# Altium PCB 606-200041.PcbDoc
Units mm, origin at the board's own origin, x right, y up, seen from the top; angles counter-clockwise.
Board outline 38.5 x 27 mm, 4 copper layers (L01 Top Layer, L02 GND, L03 PWR, L04 Bottom Layer), stack 0.86 mm thick; 32 components, 20 nets, 125 pads, 121 vias.
Unrouted connection lines stored in the file: 1.
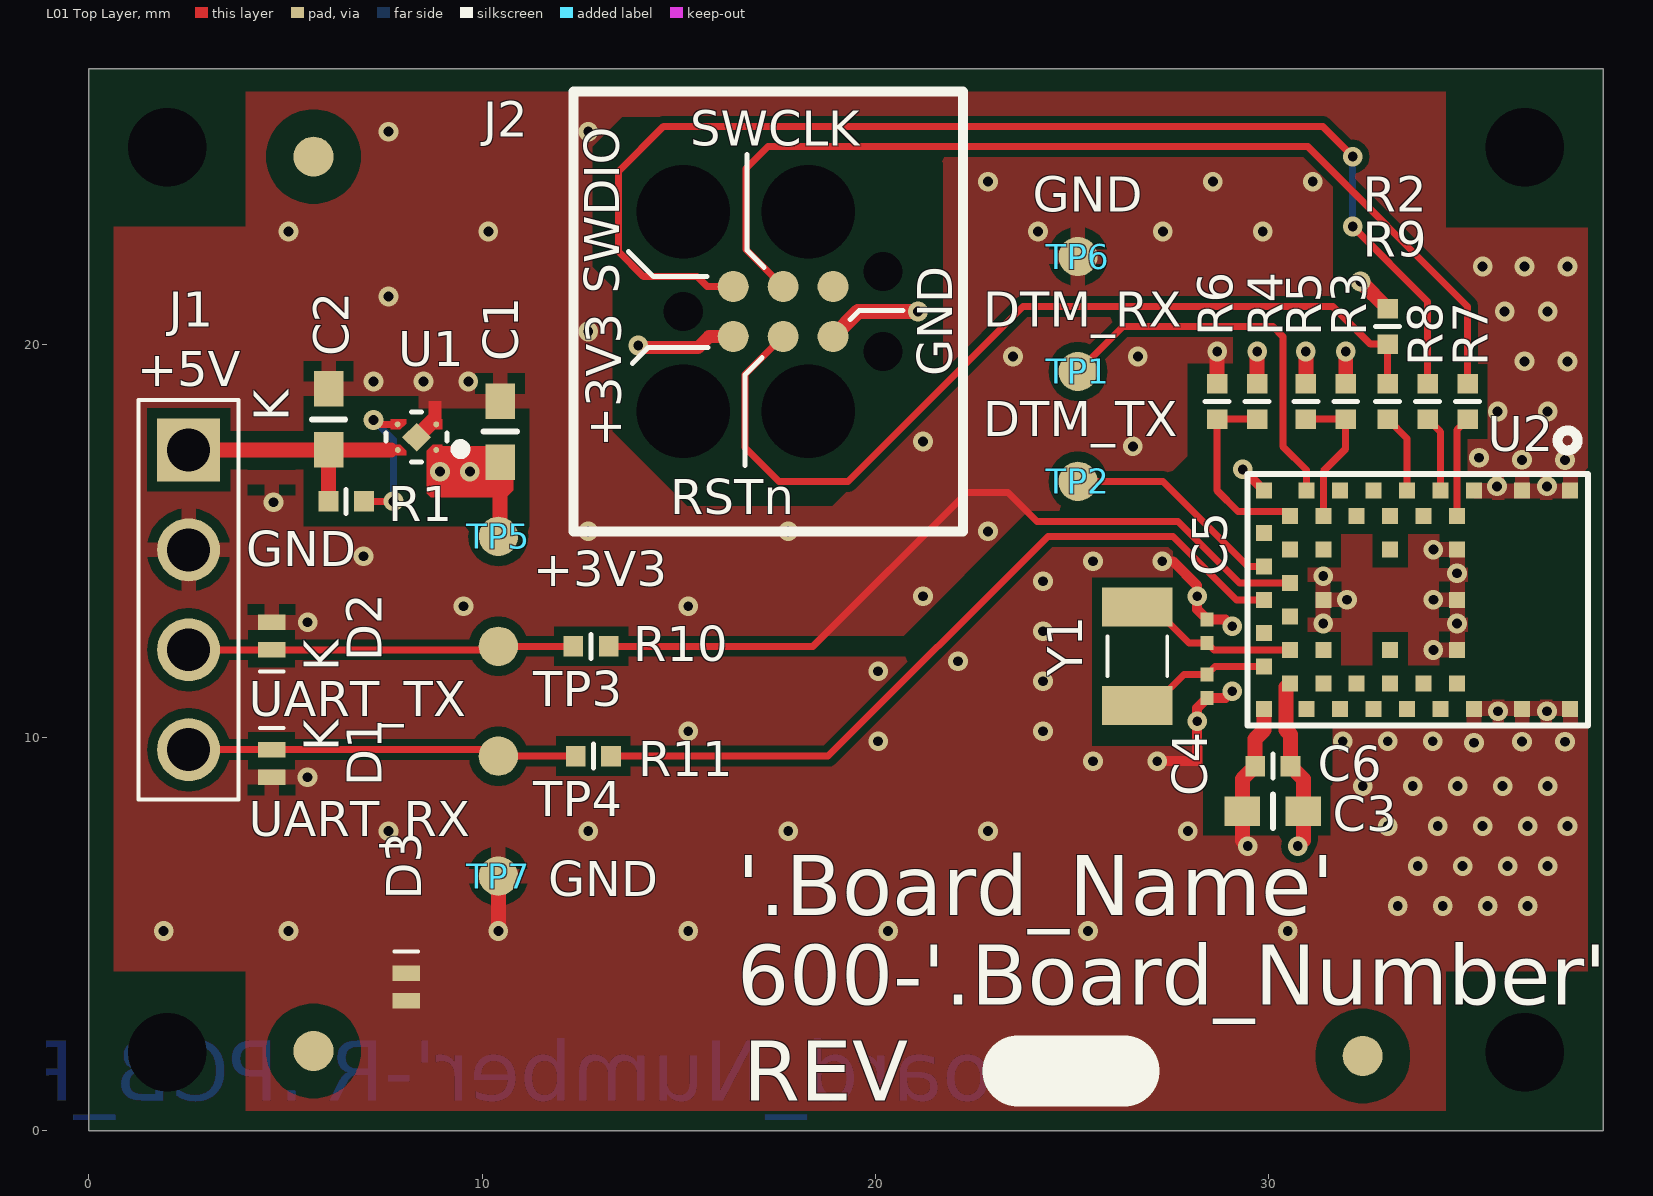
[diagram p0: L01 Top Layer view]
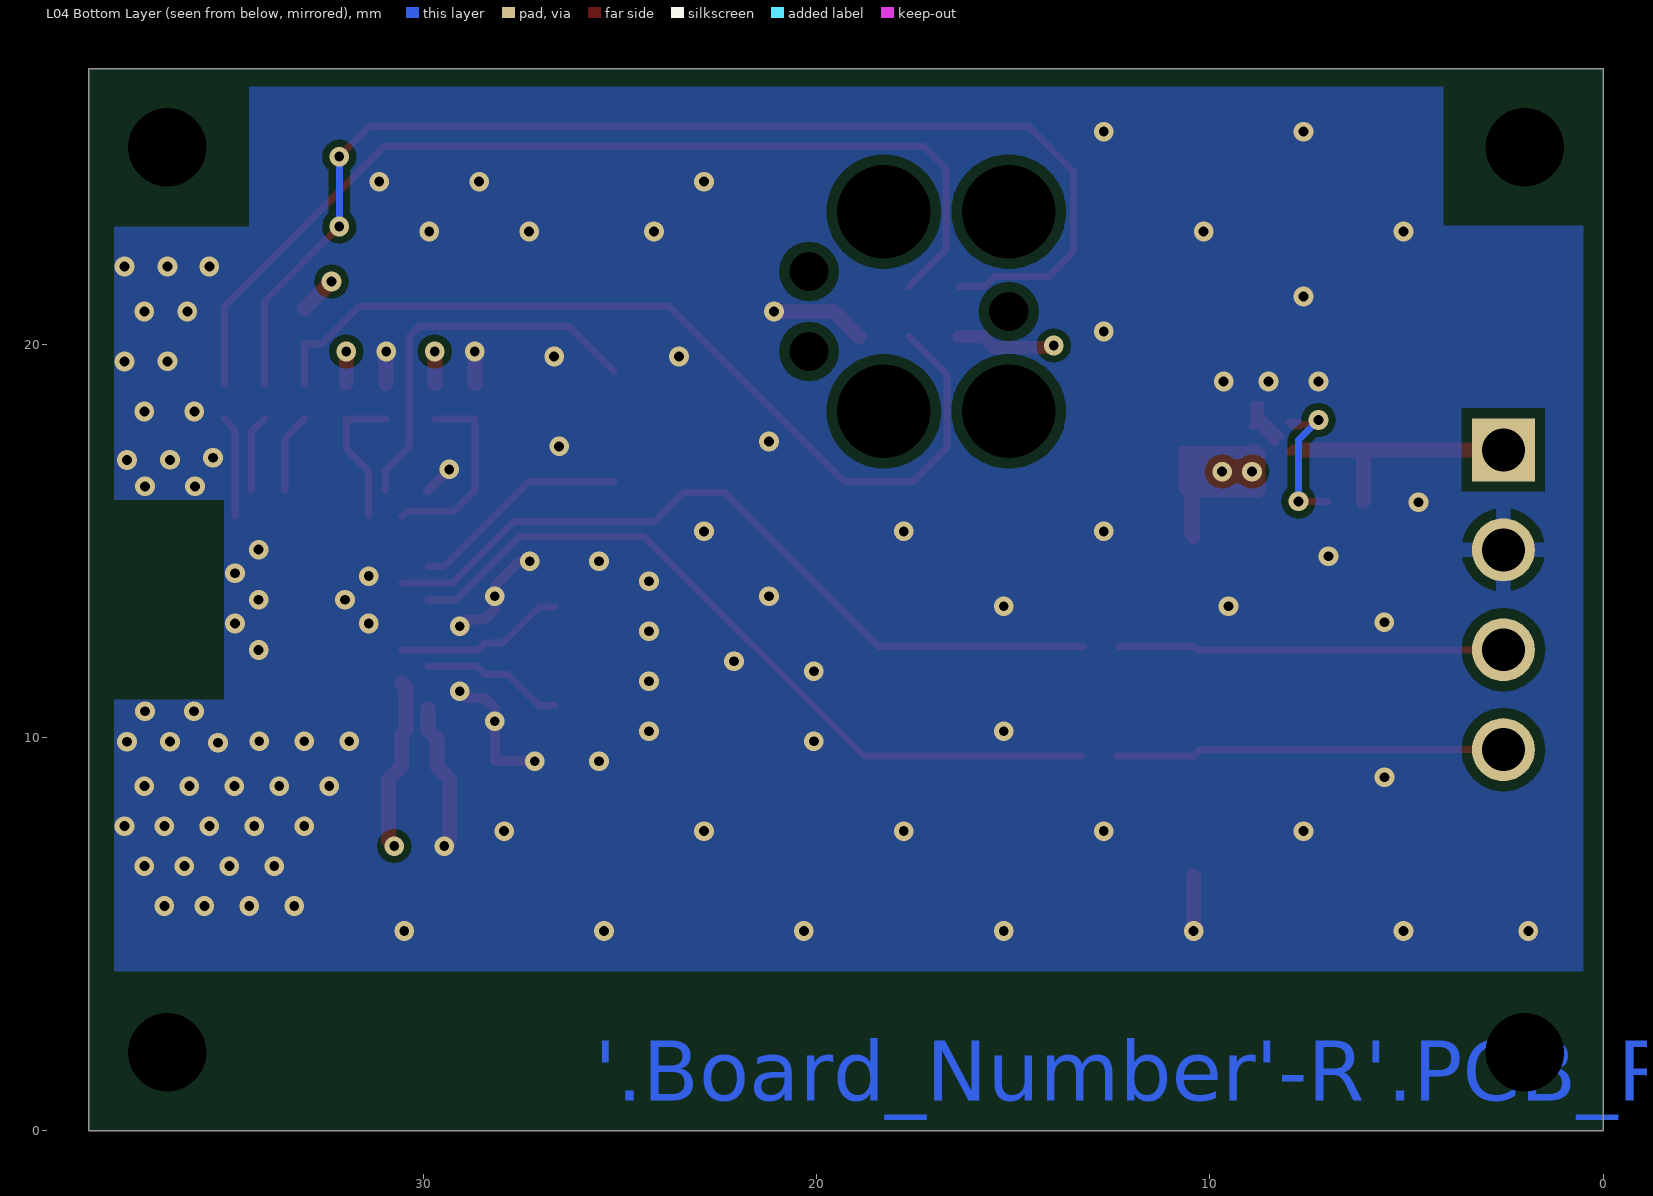
[diagram p1: L04 Bottom Layer view, seen from below]
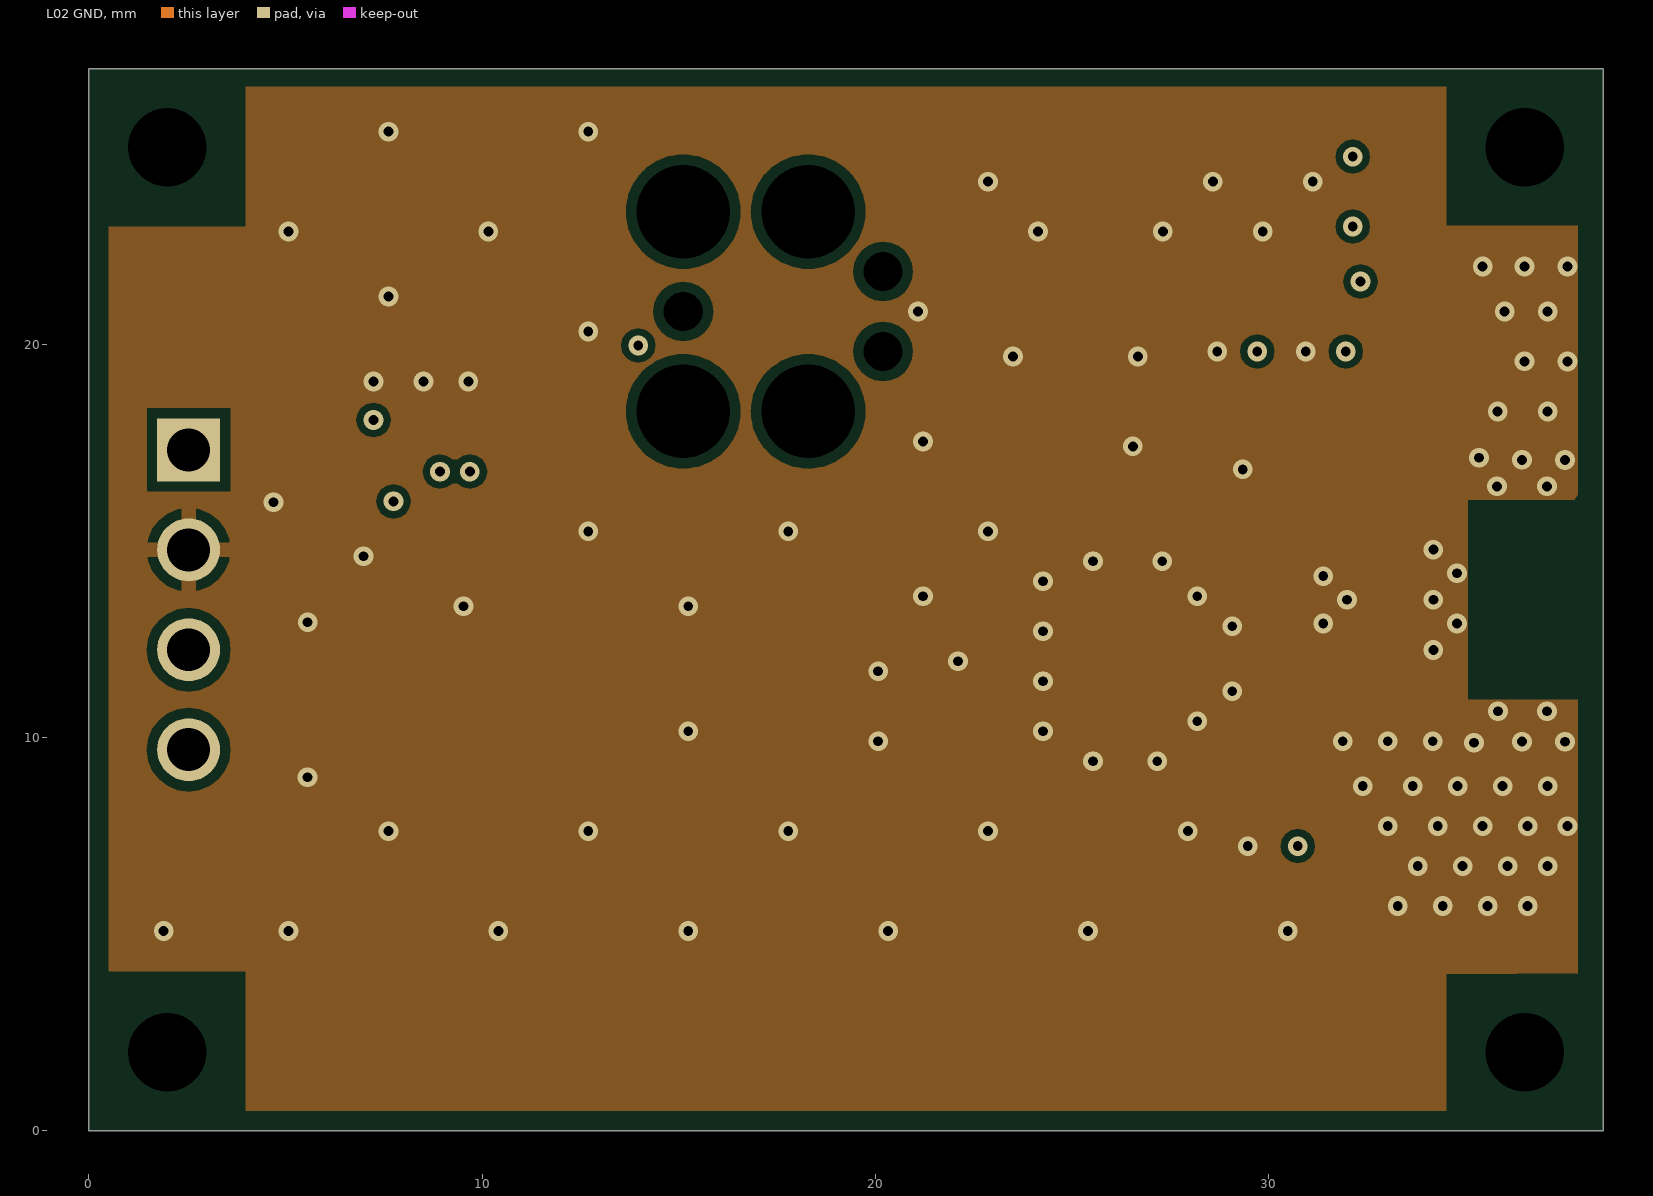
[diagram p2: L02 GND]
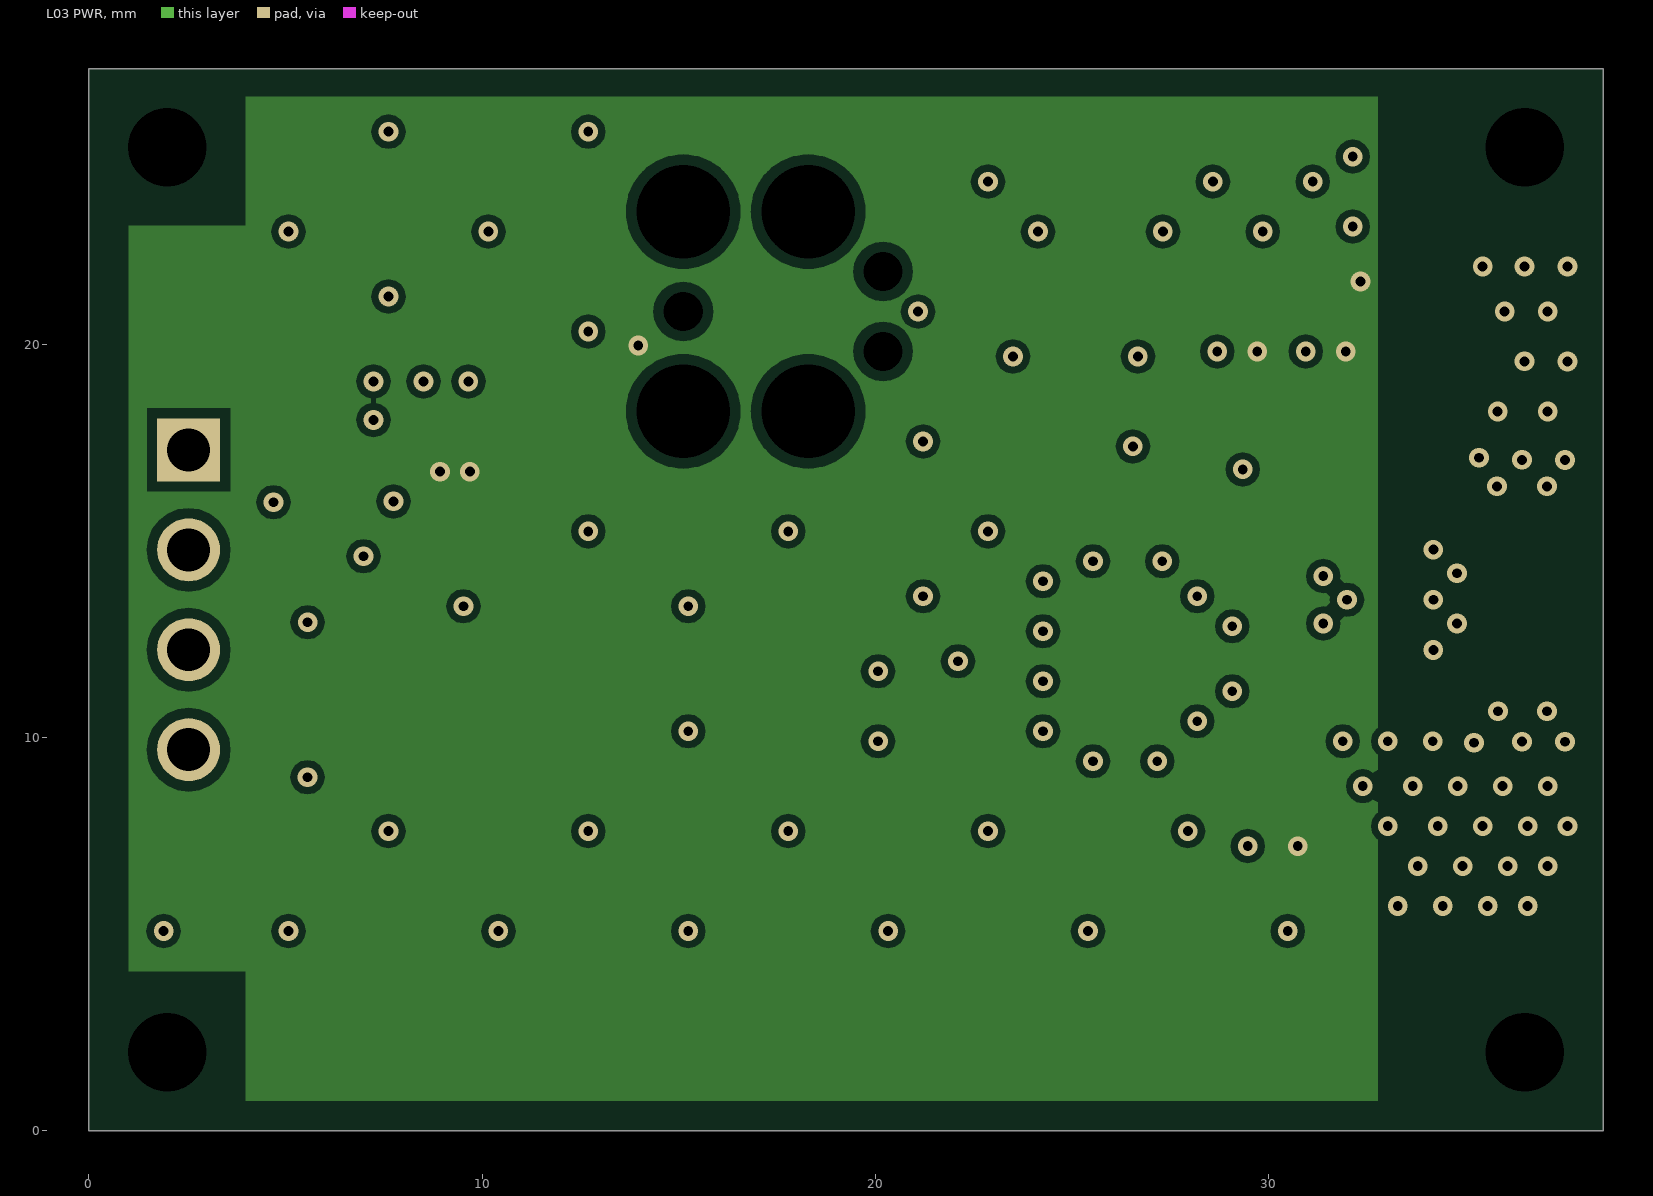
[diagram p3: L03 PWR]

## Layer stack, top to bottom
Top Solder: solder mask 0.02, Solder Resist, Dk 3.5
L01 Top Layer: signal copper 0.036
Dielectric 1: prepreg 0.127, FR-4, Dk 4.2
L02 GND: signal copper 0.036
Dielectric 2: core 0.462, FR-4, Dk 4.2
L03 PWR: signal copper 0.036
Dielectric 3: prepreg 0.127, FR-4, Dk 4.2
L04 Bottom Layer: signal copper 0.036
Bottom Solder: solder mask 0.02, Solder Resist, Dk 3.5

## Board outline
0,0 38.5,0 38.5,27 0,27

## Design rules (kind name [scope] priority, off if disabled: settings)
Clearance 50_OHM_GAP [InNetClass('50_OHM')] p1: gap=0.3 ignorepadtopadclearanceinfootprint=FALSE except(0: Arc-Hole Track-Hole SMDPad-Hole THPad-Hole Via-Hole Fill-Hole Poly-Hole Region-Hole Text-Hole)
Clearance KO [IsKeepOut] p2: gap=0 ignorepadtopadclearanceinfootprint=FALSE
Clearance [All] p3: gap=0.178 ignorepadtopadclearanceinfootprint=FALSE except(0: Arc-Hole Track-Hole SMDPad-Hole THPad-Hole Via-Hole Fill-Hole Poly-Hole Region-Hole Text-Hole; 0.127: Track-SMDPad; 0.152: SMDPad-Region; 0.254: SMDPad-Poly THPad-Poly; 0.381: Poly-Poly Poly-Region)
ComponentClearance [All] p1: gap=0.18 collisioncheckmode=3 verticalgap=0.18 showdistances=FALSE
DiffPairsRouting 90_OHM_DIFF [InDifferentialPairClass('All Differential Pairs')] p1: maxlimit=0.15 minlimit=0.15 mostfreqgap=0.15 toplayer_minwidth=0.179 toplayer_maxwidth=0.179 toplayer_prefwidth=0.179 midlayer2_minwidth=0.179 midlayer2_maxwidth=0.179 midlayer2_prefwidth=0.179 midlayer3_minwidth=0.179 midlayer3_maxwidth=0.179 midlayer3_prefwidth=0.179 bottomlayer_minwidth=0.179 bottomlayer_maxwidth=0.179 bottomlayer_prefwidth=0.179 maxuncoupledlength=12.7
DiffPairsRouting 100_OHM_DIFF [InDifferentialPair('No Differential Pair')] p2: maxlimit=0.254 minlimit=0.254 mostfreqgap=0.254 toplayer_minwidth=0.381 toplayer_maxwidth=0.381 toplayer_prefwidth=0.381 midlayer2_minwidth=0.381 midlayer2_maxwidth=0.381 midlayer2_prefwidth=0.381 midlayer3_minwidth=0.381 midlayer3_maxwidth=0.381 midlayer3_prefwidth=0.381 bottomlayer_minwidth=0.381 bottomlayer_maxwidth=0.381 bottomlayer_prefwidth=0.381 maxuncoupledlength=12.7
HoleSize [All] p1: absolutevalues=TRUE maxlimit=10 minlimit=0.1 maxpercent=80.000 minpercent=20.000
HoleToHoleClearance [All] p1: gap=0.25 allowstackedmicrovias=TRUE
MinimumSolderMaskSliver MinimumSolderMaskSliver_1 [isvia vs IsPad] p1: minsoldermaskwidth=0
MinimumSolderMaskSliver [All] p2: minsoldermaskwidth=0.076
PlaneClearance [All] p1: clearance=0.2
PlaneConnect [All] p1: planeconnectstyle=Direct reliefexpansion=0.508 reliefentries=4 reliefconductorwidth=0.254 reliefairgap=0.254
PolygonConnect MTG [HasFootprint('MTG*')] p1: connectstyle=Direct reliefconductorwidth=0.25 reliefentries=4 polygonreliefangle="90 Angle" airgapwidth=0.125
PolygonConnect POLY_VIA [IsVia vs IsPolygon] p2: connectstyle=Direct reliefconductorwidth=0.254 reliefentries=4 polygonreliefangle="90 Angle" airgapwidth=0.254
PolygonConnect PolygonConnect_smd [All] p3: connectstyle=Relief reliefconductorwidth=0.381 reliefentries=4 polygonreliefangle="90 Angle" airgapwidth=0.254
PolygonConnect PolygonConnect_thru [IsThruPin] p4: connectstyle=Relief reliefconductorwidth=0.508 reliefentries=4 polygonreliefangle="45 Angle" airgapwidth=0.254
RoomDefinition "BLE Module" [InComponentClass('BLE Module')] p1: confinementstyle=ConfineIn formatcopy=TRUE lockcomponents=FALSE outline 0,0 41.021,0 41.021,27 0,27
RoutingVias [All] p1: holewidth=0.25 width=0.5 viastyle="Through Hole" minholewidth=0.25 minwidth=0.5 maxholewidth=0.25 maxwidth=0.5
SilkToSilkClearance [All] p1 off: silktosilkclearance=0.05
SilkToSolderMaskClearance [IsPad] p1: minsilkscreentomaskgap=0.125 clearancetoexposedcopper=TRUE
SolderMaskExpansion [All] p1: expansion=0.05
Width PWR_GND [InNetClass('PWR_GND')] p1: maxlimit=0.25 minlimit=0.25 preferedwidth=0.25
Width 50_OHM_TRACE [InNetClass('50_OHM')] p2: maxlimit=0.33 minlimit=0.33 preferedwidth=0.33
Width [All] p3: maxlimit=0.5 minlimit=0.178 preferedwidth=0.178
21 further rules are at their usual default settings.

## Components (designator, comment, footprint, x,y, rotation, side; value= is the part's Value field where it differs from the comment)
C1 "1uF" 0603-ipcsm_90 10.458,17.775 r270 top
C2 "1uF" 0603-ipcsm_90 6.096,18.085 r270 top
C3 "4.7uF" 0603-ipcsm_90 30.099,8.128 r0 top
C4 "4pF" 0201-ipcsm_33 28.432,11.303 r270 top
C5 "4pF" 0201-ipcsm_33 28.432,12.7 r90 top
C6 "0.1uF" 0402-ipcsm_55 30.099,9.271 r180 top
D1 "PESD12VS1ULD,315" SOD882D#1 4.649,9.34 r270 top
D2 "PESD12VS1ULD,315" SOD882D#1 4.649,12.58 r90 top
D3 "PESD12VS1ULD,315" SOD882D#2 8.077,3.658 r270 top
J1 "4 TH pads" HEADER_1X4 2.54,17.31 r270 top locked
J2 "Programming Header" TC2030-MCP 15.113,20.828 r0 top
R1 "470k" 0402-ipcsm_40 6.546,16.002 r0 top
R2 "470k" 0402-ipcsm_40 33.02,20.447 r270 top
R3 "470k" 0402-ipcsm_40 31.953,18.542 r270 top
R4 "470k" 0402-ipcsm_40 29.702,18.542 r270 top
R5 "470k" 0402-ipcsm_40 30.937,18.542 r90 top
R6 "470k" 0402-ipcsm_40 28.686,18.542 r90 top
R7 "0" 0402-ipcsm_40 35.052,18.542 r270 top
R8 "0" 0402-ipcsm_40 34.036,18.542 r270 top
R9 "0" 0402-ipcsm_40 33.02,18.542 r270 top
R10 "0" 0402-ipcsm_40 12.769,12.319 r0 top
R11 "0" 0402-ipcsm_40 12.827,9.525 r0 top
TP1 "tp-1mm" TP-1MM 25.146,19.304 r0 top
TP2 "tp-1mm" TP-1MM 25.146,16.51 r0 top
TP3 "tp-1mm" TP-1MM 10.414,12.319 r0 top
TP4 "tp-1mm" TP-1MM 10.414,9.525 r0 top
TP5 "tp-1mm" TP-1MM 10.414,15.113 r0 top locked
TP6 "tp-1mm" TP-1MM 25.146,22.225 r0 top
TP7 "tp-1mm" TP-1MM 10.414,6.477 r0 top
U1 "TLV73333PDQN" son4_tlv707dqn 8.333,17.635 r270 top
U2 "BMD-350-A-R" BMD-350 33.782,13.5 r180 top locked
Y1 "32.768 kHz" xtal_ABS07-120 26.654,12.065 r90 top

## Footprints (in the part's own frame and the unit in brackets; to place one, negate y for a bottom-side part, rotate by r counter-clockwise, add the part's x,y. Pads: shape width x height; smd on the part's side, far side on the other; paste and mask are expansions set on the pad)
0201-ipcsm_33 [mm] "0201-IPCSM_33"
  rect 0.35x0.33 smd mask+0.05: 1(-0.3,0) 2(0.3,0)
  body extent -0.25,-0.13 0.25,0.13, height 0.33
0402-ipcsm_40 [mm] "0402-IPCSM_40"
  rect 0.5x0.52 smd mask+0.05: 1(-0.45,0) 2(0.45,0)
  silkscreen extent 0,-0.3 0,0.3, body extent -0.5,-0.2 0.5,0.2, height 0.4
0402-ipcsm_55 [mm] "0402-IPCSM_55"
  rect 0.5x0.52 smd mask+0.05: 1(-0.45,0) 2(0.45,0)
  silkscreen extent 0,-0.3 0,0.3, body extent -0.5,-0.2 0.5,0.2, height 0.55
0603-ipcsm_90 [mm] "0603-IPCSM_90"
  rect 0.9x0.75 smd mask+0.05: 1(0.775,0) 2(-0.775,0)
  silkscreen extent 0,-0.42 0,0.42, body extent -0.8,-0.3 0.8,0.3, height 0.9
BMD-350 [mil]
  rect 16x16 smd mask+2: 1(-152.48,-109.25) 2(-104.45,-109.25) 3(-56.42,-109.25) 4(-39.37,-83.66) 5(-22.64,-109.25) 6(-5.91,-83.66) 7(10.83,-109.25) 8(27.56,-83.66) 9(44.29,-109.25) 10(61.02,-83.66) 11(77.76,-109.25) 12(94.49,-83.66) 13(111.22,-109.25) 14(127.95,-83.66) 15(153.74,-109.25) 16(153.74,-66.93) 17(127.95,-50.2) 18(153.74,-33.46) 19(127.95,-16.73) 20(153.74,0) 21(127.95,16.73) 22(153.74,33.46) 23(127.95,50.2) 24(153.74,66.93) 25(127.95,83.66) 26(153.74,109.25) 27(111.22,109.25) 28(94.49,83.66) 29(77.76,109.25) 30(61.02,83.66) 31(44.29,109.25) 32(27.56,83.66) 33(10.83,109.25) 34(-5.91,83.66) 35(-22.64,109.25) 36(-39.37,83.66) 37(-56.42,109.25) 38(-104.45,109.25) 39(-152.48,109.25) 40(-39.37,-50.2) 41(27.56,-50.2) 42(94.49,-50.2) 43(94.49,0) 44(94.49,50.2) 45(27.56,50.2) 46(-39.37,50.2) 47(-39.37,0)
  Multi-Layer pour cut-out: -275,125 -165,125 -165,100 -50,100 -50,-100 -170.28,-100 -170.28,-125 -275,-125
  silkscreen extent -170,-169 170,126, body extent -169,-127 172,125, height 59
HEADER_1X4 [mil] "9 pin header"
  rect 63x63 hole 43: 1(0,0)
  round 63 hole 43: 2(100,0) 3(200,0) 4(300,0)
  silkscreen extent -50,-50 350,50
SOD882D#1 [mm]
  rect 0.4x0.7 smd mask+0.05: A(0.35,0) C(-0.35,0)
  silkscreen extent -0.9,-0.3 -0.9,0.3, body extent -0.51,-0.31 0.51,0.31, height 0.5
SOD882D#2 [mm]
  rect 0.4x0.7 smd mask+0.05: A(0.35,0)
  rect 0.4x0.7 smd paste-1 mask+0.05: C(-0.35,0)
  silkscreen extent -0.9,-0.3 -0.9,0.3, body extent -0.51,-0.31 0.51,0.31, height 0.5
son4_tlv707dqn [mm] "100x100x43_65p"
  round 0.15 smd paste-5 mask-5: 1(0.325,0.5) 2(-0.325,0.5) 3(-0.325,-0.48) 4(0.325,-0.475)
  rect 0.52x0.52 smd rot 45 paste-0.1 mask+0.05: 5(0,0)
  L01 Top Layer region: -0.455,0.26 -0.455,0.65 -0.195,0.65 -0.195,0.41 -0.345,0.26
  L01 Top Layer region: 0.455,-0.26 0.455,-0.65 0.195,-0.65 0.195,-0.41 0.345,-0.26
  L01 Top Layer region: -0.455,-0.26 -0.455,-0.65 -0.195,-0.65 -0.195,-0.41 -0.345,-0.26
  L01 Top Layer region: 0.455,0.26 0.455,0.65 0.195,0.65 0.195,0.41 0.345,0.26
  silkscreen extent -0.64,-0.77 0.64,1.24, body extent -0.53,-0.53 0.53,0.53, height 0.4
TC2030-MCP [mm] "Tag-Connect 6-Pin with Legs (PN# TC2030-IDC-NL)"
  round 2.3 hole 2.375 unplated: 0(0,-2.54) 0(0,2.54) 0(3.175,-2.54) 0(3.175,2.54)
  round 0.9 hole 0.995 unplated: 0(0,0) 0(5.08,-1.016) 0(5.08,1.016)
  round 0.79 smd paste-0.406 mask+0.064: 1(1.27,-0.635) 2(1.27,0.635) 3(2.54,-0.635) 4(2.54,0.635) 5(3.81,-0.635) 6(3.81,0.635)
  silkscreen extent -2.79,-5.59 7.11,5.59
TP-1MM [mm] "Testpoint, single 1mm round pad"
  round 1 smd paste-1: 1(0,0)
xtal_ABS07-120 [mm]
  rect 1x1.8 smd mask+0.064: 1(-1.25,0) 2(1.25,0)
  silkscreen extent -0.51,-0.76 0.51,0.76, body extent -1.6,-0.75 1.6,0.75, height 0.89

## Part data
C1 C2: library part CL10B105MO8NNWC, "CAP CER 1UF 16V X7R 0603", Dielectric=X7R, Tolerance=20%, Voltage=16V, dist=Digikey, dist_pn=1276-6524-1-ND, Height=0.9mm, mfg=Samsung, mfg_pn=CL10B105MO8NNWC, Part_Type=capacitor, Status=NS, syn_pn=610-003669, TableName=avCapacitors
C3: library part GRM188R61C475KAAJD, "CAP CER 4.7UF 16V X5R 0603", Dielectric=X5R, Tolerance=10%, Voltage=16V, dist=Digikey, dist_pn=490-10481-1-ND, Height=0.95mm, mfg=Murata, mfg_pn=GRM188R61C475KAAJD, Part_Type=capacitor, Status=NS, syn_pn=610-003943, TableName=avCapacitors
C4 C5: library part GRM0335C1H4R0BA01D, "CAP CER 4PF 50V C0G/NP0 0201", Dielectric=C0G-NPO, Tolerance=2.5%, Voltage=25V, dist=Digikey, dist_pn=490-12684-2-ND, Height=0.33mm, mfg=Murata, mfg_pn=GRM0335C1H4R0BA01D, Part_Type=capacitor, Status=NS, syn_pn=610-008218, TableName=avCapacitors
C6: library part GRM155R71C104KA88D, "CAP CER .1UF 16V X7R 0402", Dielectric=X7R, Tolerance=10%, Voltage=16V, dist=Digikey, dist_pn=490-3261-1-ND, Height=0.55mm, mfg=Murata, mfg_pn=GRM155R71C104KA88D, Part_Type=capacitor, Status=NS, syn_pn=610-003626, TableName=avCapacitors
D1 D2 D3: "TVS DIODE 12V 35V 2DFN1006D", dist=Digikey, dist_pn=1727-1303-1-ND, Height=0.4mm, mfg="Nexperia USA Inc.", mfg_pn=PESD12VS1ULD,315, Part_Type=esd-tvs, Status=CUR, syn_pn=610-008225, TableName=avComponents
J1: "55 mm ZEBRA STRIP", Part_Type=connector, syn_pn=610-008220, TableName=avLayouts
J2: library part FOOTPRINT_TC2030-MCP, "FOOTPRINT for CBL PLUG-OF-NAILS 6-PIN WITH CLIP", mfg_pn=FOOTPRINT_TC2030-MCP, Part_Type=layout, syn_pn=610-007685, TableName=avLayouts
R1 R2 R3 R4 R5 R6: library part ERJ-2RKF4703X, "RES 470K OHM 1/16W 1% 0402 SMD", Power=0.0625W, Tolerance=1%, dist=Digikey, dist_pn=P470KLCT-ND, Height=0.4mm, mfg=Panasonic, mfg_pn=ERJ-2RKF4703X, Part_Type=resistor, Status=NS, syn_pn=610-006329, TableName=avResistors
R7 R8 R9 R10 R11: library part ERJ-2GE0R00X, "RES 0.0 OHM 1/10W JUMP 0402 SMD", Power=0.1W, Tolerance=0%, dist=Digikey, dist_pn=P0.0JCT-ND, Height=0.4mm, mfg=Panasonic, mfg_pn=ERJ-2GE0R00X, Part_Type=resistor, Status=NS, syn_pn=610-006042, TableName=avResistors
TP1 TP2 TP3 TP4 TP5 TP6 TP7: library part TP_SMT_RD_1mm, "TESTPOINT, 1MM SMD", mfg_pn=TP_SMT_RD_1mm, Part_Type=test-point, syn_pn=610-007841, TableName=avLayouts
U1: library part TLV73333PDQNR, "IC REG LINEAR 3.3V 300MA 4X2SON", dist=Digikey, dist_pn=296-40674-1-ND, Height=0.4mm, mfg="Texas Instruments", mfg_pn=TLV73333PDQNR, Part_Type=ic, Status=NS, syn_pn=610-002632, TableName=avComponents
U2: "MOD BLE 4.2 NORDIC NRF52832 SOC", Manufacturer=Rigado, Part Number=BMD-350-A, RF Freq=2.4GHz, Added By="Cam N", Added Date=8/9/2016, dist=Digikey, dist_pn=1604-1012-1-ND, Height=1.35mm, Internal Antenna="Ceramic Chip", Manufacturer P/N=BMD-350-A-R, mfg="Rigado, Inc.", mfg_pn=BMD-350-A-R, Part_Type=rf-ic, Protocol="BLE 4.2", Size="8.65mm x 6.4mm", Status=CUR, syn_pn=610-008217, TableName=avComponents
Y1: library part ABS07-120-32.768KHZ-T, "CRYSTAL 32.768KHZ 6PF SMD", dist=Digikey, dist_pn=535-11937-1-ND, Height=0.9mm, mfg=Abracon, mfg_pn=ABS07-120-32.768KHZ-T, Part_Type=crystal, Status=NS, syn_pn=610-003300, TableName=avComponents

## Free pads (board coordinates)
  round 0 hole 2 unplated mask+1.1: 1(2,2) 1(2,25) 1(36.5,2) 1(36.5,25)
  round 1.016 smd mask+0.508: 1(5.715,2.032) 1(5.715,24.765) 1(32.385,1.905)

## Via types
v1: diameter 0.5, hole 0.25, L01 Top Layer to L04 Bottom Layer, tented both sides, 121 vias

## Nets (pads, with @x,y where several pads share a name; then routed paths per layer and width w, separated by ;. In a path a pad name is that pad's centre, name@x,y a point inside that pad or via, vN(x,y) a via of type N, cw(c..) or ccw(c..) an arc to the next point about the centre after c; other vN are vias at no path point)
+3.3V: C1.1 C3.1 C6.1 J2.1 R2.1 R3.1 R4.1 TP5.1 U1.1 U2.25 | length 11.5
  L01 Top Layer w0.33: v1(13.97,19.964) 14.021,19.914 15.494,19.914 15.773,20.193 J2.1
  L01 Top Layer w0.381: TP5.1 10.458,15.157 C1.1 ; R4.1 v1(29.702,19.812) ; U2.25 30.436,11.279 30.436,10.188 30.549,10.075 C6.1 30.874,8.946 C3.1 30.874,7.379 v1(30.734,7.239) ; R3.1 v1(31.953,19.812) ; v1(32.327,21.59) R2.1
  other v1: 8.928,16.759 9.69,16.759
+5V: C2.1 D3.C J1.1 R1.1 U1.4 | length 6.5
  L01 Top Layer w0.381: J1.1 4.699,17.31 C2.1 ; R1.1 C2.1 ; 7.683,17.31 C2.1
BLE_RESETn: J2.3 R2.2 R9.1 | length 23.2
  L01 Top Layer w0.178: J2.3 16.688,19.228 16.688,17.374 17.551,16.51 19.304,16.51 23.749,20.955 31.623,20.955 32.581,19.997 R2.2 R9.1
BMDware_BeaconOnly: R3.2 R5.1 U2.12 | length 3.7
  L01 Top Layer w0.178: R5.1 R3.2 31.953,17.339 31.382,16.768 U2.12
BMDware_UART_AT_n: R4.2 R6.1 U2.14 | length 5
  L01 Top Layer w0.178: R4.2 R6.1 28.686,16.272 29.21,15.748 30.409,15.748 U2.14
DTM_EN/UART_RX: TP1.1 U2.13 | length 10
  L01 Top Layer w0.178: TP1.1 26.289,20.447 30.099,20.447 30.353,20.193 30.353,17.399 30.957,16.795 U2.13
DTM_UART_TX: TP2.1 U2.18 | length 5.6
  L01 Top Layer w0.178: TP2.1 27.305,16.51 29.465,14.35 U2.18
GND: C1.2 C2.2 C3.2 C4.2 C5.2 C6.2 D1.A D2.A D3.A J1.2 J2.5 R5.2 R6.2 TP6.1 TP7.1 U1.2 U1.5 U2.1 U2.2 U2.3 U2.15 U2.26 U2.37 U2.38 U2.39 U2.40 U2.43 U2.46 U2.47 | length 16.2
  L01 Top Layer w0.254: v1(27.162,9.398) 28.178,9.398 v1(28.178,10.414) 28.178,10.749 C4.2 28.894,11.003 v1(29.067,11.176) ; v1(27.289,14.478) 27.559,14.478 28.178,13.859 v1(28.178,13.589) 28.178,13.254 C5.2 28.894,13 v1(29.067,12.827) ; v1(29.337,16.815) U2.15
  L01 Top Layer w0.381: v1(10.414,5.08) TP7.1 ; J2.5 19.558,20.828 v1(21.082,20.828) ; R6.2 v1(28.686,19.812) ; v1(29.464,7.239) 29.324,7.379 C3.2 29.324,8.946 C6.2 29.649,9.964 29.877,10.192 U2.26 ; R5.2 v1(30.937,19.812)
  other v1: 1.905,5.08 5.08,5.08 15.24,5.08 20.32,5.08 25.4,5.08 30.48,5.08 33.274,5.715 34.417,5.715 35.56,5.715 36.576,5.715 33.782,6.731 34.925,6.731 36.068,6.731 37.084,6.731 7.62,7.62 12.7,7.62 17.78,7.62 22.86,7.62 27.94,7.62 33.02,7.747 34.29,7.747 35.433,7.747 36.576,7.747 37.592,7.747 32.385,8.763 33.655,8.763 34.798,8.763 35.941,8.763 37.084,8.763 5.561,8.99 25.527,9.398 35.215,9.866 20.066,9.906 31.877,9.906 33.02,9.906 34.163,9.906 36.435,9.895 37.528,9.893 15.24,10.16 24.257,10.16 35.825,10.668 37.068,10.668 24.257,11.43 20.066,11.684 22.098,11.938 34.18,12.225 24.257,12.7 31.382,12.898 34.782,12.898 5.564,12.93 9.525,13.335 15.24,13.335 31.984,13.5 34.18,13.5 21.209,13.589 24.257,13.97 31.382,14.102 34.782,14.173 25.527,14.478 6.985,14.605 34.18,14.775 12.7,15.24 17.78,15.24 22.86,15.24 4.699,15.981 35.798,16.383 37.068,16.383 36.435,17.057 37.528,17.056 35.342,17.109 26.543,17.399 21.209,17.526 35.814,18.288 37.084,18.288 7.239,19.05 8.509,19.05 9.652,19.05 36.499,19.56 37.592,19.558 23.495,19.685 26.67,19.685 12.7,20.32 35.991,20.83 37.084,20.828 7.62,21.209 35.433,21.971 36.499,21.973 37.592,21.971 5.08,22.86 10.16,22.86 24.13,22.86 27.305,22.86 29.845,22.86 22.86,24.13 28.575,24.13 31.115,24.13 7.62,25.4 12.7,25.4
NetR1_2: R1.2 U1.3 | length 3.7
  L01 Top Layer w0.178: R1.2 v1(7.747,16.002) ; v1(7.239,18.072) 7.351,17.96 U1.3
  L04 Bottom Layer w0.178: v1(7.239,18.072) 7.747,17.564 v1(7.747,16.002)
NetR7_2: R7.2 U2.4 | length 2.6
  L01 Top Layer w0.178: U2.4 34.782,17.822 R7.2
NetR8_2: R8.2 U2.5 | length 1.9
  L01 Top Layer w0.178: R8.2 34.357,17.771 U2.5
NetR9_2: R9.2 U2.7 | length 2
  L01 Top Layer w0.178: R9.2 33.507,17.605 U2.7
NetR10_2: R10.2 U2.19 | length 19.9
  L01 Top Layer w0.178: R10.2 18.415,12.319 22.327,16.231 23.368,16.231 24.105,15.494 27.686,15.494 29.255,13.925 U2.19
NetR11_2: R11.2 U2.20 | length 19.6
  L01 Top Layer w0.178: R11.2 18.796,9.525 24.384,15.113 27.559,15.113 29.172,13.5 U2.20
SWCLK: J2.4 R7.1 | length 25.6
  L01 Top Layer w0.178: J2.4 16.713,22.403 16.713,24.46 17.272,25.019 30.988,25.019 35.052,20.955 R7.1
SWDIO: J2.2 R8.1 | length 31.3
  L01 Top Layer w0.178: J2.2 15.723,21.463 15.469,21.717 14.097,21.717 13.462,22.352 13.462,24.384 14.605,25.527 31.369,25.527 v1(32.131,24.765) ; v1(32.131,22.987) 34.036,21.082 R8.1
  L04 Bottom Layer w0.178: v1(32.131,22.987) v1(32.131,24.765)
UART_RX: D1.C J1.4 R11.1 TP4.1 | length 9.9
  L01 Top Layer w0.178: J1.4 4.699,9.69 10.249,9.69 TP4.1 R11.1
UART_TX: D2.C J1.3 R10.1 TP3.1 | length 10.1
  L01 Top Layer w0.178: J1.3 D2.C@4.699,12.23 ; D2.C@4.389,12.23 D2.C@4.699,12.23 ; R10.1 TP3.1 10.325,12.23 D2.C@4.699,12.23
XL1: C4.1 U2.24 Y1.1 | length 3.6
  L01 Top Layer w0.178: Y1.1 27.055,10.815 27.843,11.603 C4.1 28.629,11.8 U2.24
XL2: C5.1 U2.23 Y1.2 | length 4.3
  L01 Top Layer w0.178: Y1.2 27.055,13.315 27.97,12.4 C5.1 28.607,12.225 U2.23
pads on no net: J2.0 J2.6 U2.6 U2.8 U2.9 U2.10 U2.11 U2.16 U2.17 U2.21 U2.22 U2.27 U2.28 U2.29 U2.30 U2.31 U2.32 U2.33 U2.34 U2.35 U2.36 U2.41 U2.42 U2.44 U2.45

## Polygon pours and split planes (outlines as drawn)
no net on TITLEBLOCK (solid): 2.42,-45.07 2.42,-46.27 4.82,-46.27 ccw(c4.829,-45.98) 5.12,-45.97 5.12,-45.264 ccw(c4.816,-45.274) 4.826,-44.97 2.52,-44.97 2.49,-44.975 2.46,-44.99 2.435,-45.015 2.425,-45.04
no net on TITLEBLOCK (solid): -2.42,-46.87 -1.43,-45.07 -0.53,-46.87 -2.42,-46.87
no net on TITLEBLOCK (solid): -13.11,-44.75 -11.782,-46.179 -10.507,-44.75
no net on TITLEBLOCK (solid): -7.948,-44.76 -5.18,-47.288 -5.18,-44.76
no net on TITLEBLOCK (solid): -8.85,-44.75 -9.85,-44.75 -11.5,-46.594 -11.5,-48.3 -12.1,-48.3 -12.1,-46.597 -13.85,-44.75 -14.905,-44.75 cw(c-15.302,-45.059) -14.8,-45.1 -14.8,-45.5 -15.3,-45.5 -15.3,-45.072 ccw(c-15.4,-45.099) -15.369,-45 -18,-45 ccw(c-18.001,-45.099) -18.1,-45.1 -18.1,-45.966 ccw(c-17.983,-45.933) -18.016,-46.05 -15.4,-46.05 cw(c-15.349,-46.649) -14.75,-46.7 -14.75,-47.65 cw(c-15.352,-47.699) -15.4,-48.3 -18.05,-48.3 cw(c-18.092,-47.742) -18.65,-47.7 -18.65,-47.15 -18.05,-47.15 -18.05,-47.637 ccw(c-17.937,-47.637) -17.937,-47.75 -15.4,-47.75 ccw(c-15.438,-47.613) -15.3,-47.65 -15.3,-46.7 ccw(c-15.438,-46.736) -15.395,-46.6 -18.029,-46.6 cw(c-18.05,-45.999) -18.65,-45.95 -18.65,-45.1 cw(c-17.947,-45.112) -18.55,-44.75 -23.827,-44.75 ccw(c-23.829,-50.568) -29.645,-50.43 -29.655,-51.37 29.05,-51.37 29.05,-44.75 15.6,-44.75 15.6,-45 12.4,-45 12.4,-46.05 15.45,-46.05 15.45,-46.62 12.4,-46.62 12.4,-47.72 15.45,-47.72 15.45,-48.3 11.8,-48.3 11.8,-44.75 10.495,-44.75 cw(c9.992,-45.092) 10.6,-45.1 10.6,-45.5 10.092,-45.501 10.1,-45.077 ccw(c10,-45.101) 10.023,-45 7.4,-45 ccw(c7.402,-45.102) 7.3,-45.1 7.3,-45.95 ccw(c7.439,-45.911) 7.4,-46.05 10,-46.05 cw(c10.011,-46.689) 10.65,-46.675 10.65,-47.675 cw(c10.015,-47.666) 10,-48.3 7.4,-48.3 cw(c7.352,-47.698) 6.75,-47.65 6.75,-47.15 7.3,-47.15 7.3,-47.65 ccw(c7.439,-47.611) 7.4,-47.75 10,-47.75 ccw(c9.962,-47.612) 10.1,-47.65 10.1,-46.7 ccw(c9.965,-46.735) 10,-46.6 7.4,-46.6 cw(c7.353,-45.997) 6.75,-45.945 6.75,-45.1 cw(c7.261,-45.063) 6.855,-44.75 5.6,-44.75 cw(c5.019,-45.106) 5.7,-45.1 5.7,-46.15 cw(c5.101,-46.201) 5.05,-46.8 2.4,-46.8 2.4,-48.3 1.85,-48.3 1.85,-45.1 cw(c2.512,-45.1) 1.95,-44.75 -0.95,-44.75 1.05,-48.3 0.35,-48.3 -0.18,-47.42 -2.694,-47.42 -3.214,-48.3 -3.85,-48.3 -1.9,-44.75 -4.6,-44.75 -4.6,-48.3 -4.9,-48.3 -8.3,-45.15 -8.3,-48.3 -8.85,-48.3
+3.3V on L03 PWR "+3V" (solid, remove dead copper, pour order 13): 1.016,0.762 1.016,26.289 32.766,26.289 32.766,0.762
GND on L04 Bottom Layer "GND" (solid, remove dead copper, pour order 15): 37.846,2.54 0.508,2.54 0.508,26.543 37.846,26.543
GND on L02 GND "GND" (solid, remove dead copper, pour order 12): 0.508,26.543 0.508,0.508 37.846,0.508 37.846,26.543
no net on FAB_DWG (solid): 492.982,-66.202 498.58,-66.202 498.644,-66.216 498.707,-66.235 498.768,-66.26 498.826,-66.289 498.882,-66.324 498.934,-66.364 498.983,-66.408 499.027,-66.456 499.067,-66.507 499.103,-66.562 499.134,-66.62 499.159,-66.681 499.18,-66.743 499.194,-66.807 499.203,-66.872 499.207,-66.937 499.206,-66.976 499.206,-68.55 499.207,-68.551 499.206,-68.626 499.198,-68.7 499.183,-68.774 499.163,-68.846 499.136,-68.916 499.103,-68.983 499.064,-69.047 499.02,-69.107 498.971,-69.164 498.917,-69.216 498.859,-69.263 498.797,-69.305 498.731,-69.341 498.663,-69.371 498.592,-69.396 498.519,-69.414 498.445,-69.425 498.379,-69.43 492.982,-69.43 492.971,-69.429 492.961,-69.428 492.95,-69.425 492.94,-69.422 492.93,-69.417 492.921,-69.412 492.912,-69.406 492.903,-69.4 492.896,-69.392 492.889,-69.384 492.882,-69.375 492.877,-69.366 492.872,-69.357 492.868,-69.347 492.865,-69.336 492.863,-69.326 492.862,-69.32 492.862,-66.332 492.862,-66.321 492.863,-66.31 492.865,-66.3 492.867,-66.289 492.871,-66.279 492.876,-66.269 492.881,-66.26 492.887,-66.251 492.894,-66.243 492.902,-66.235 492.91,-66.228 492.919,-66.222 492.928,-66.216 492.938,-66.212 492.948,-66.208 492.959,-66.205 492.969,-66.203 492.98,-66.202 492.982,-66.202
no net on FAB_DWG (solid): 481.277,-70.561 483.546,-66.304 483.553,-66.29 483.561,-66.277 483.57,-66.264 483.58,-66.253 483.591,-66.242 483.603,-66.232 483.615,-66.224 483.629,-66.216 483.643,-66.21 483.657,-66.205 483.672,-66.201 483.687,-66.199 483.703,-66.197 483.718,-66.198 483.733,-66.199 483.748,-66.202 483.763,-66.206 483.778,-66.212 483.791,-66.218 483.805,-66.226 483.817,-66.235 483.829,-66.245 483.84,-66.256 483.849,-66.268 483.858,-66.281 483.865,-66.294 483.87,-66.304 486.134,-70.594 486.14,-70.603 486.144,-70.613 486.148,-70.623 486.151,-70.633 486.153,-70.644 486.154,-70.655 486.155,-70.665 486.154,-70.676 486.152,-70.687 486.15,-70.697 486.146,-70.707 486.142,-70.717 486.137,-70.727 486.131,-70.736 486.124,-70.744 486.116,-70.752 486.108,-70.759 486.099,-70.765 486.09,-70.771 486.081,-70.775 486.071,-70.779 486.06,-70.782 486.05,-70.784 486.039,-70.785 486.028,-70.786 486.018,-70.785 481.351,-70.785 481.339,-70.781 481.328,-70.775 481.317,-70.769 481.306,-70.762 481.296,-70.754 481.288,-70.745 481.279,-70.735 481.272,-70.724 481.266,-70.713 481.26,-70.702 481.256,-70.69 481.253,-70.678 481.251,-70.665 481.249,-70.653 481.249,-70.64 481.251,-70.627 481.253,-70.615 481.256,-70.603 481.26,-70.591 481.266,-70.579 481.272,-70.568 481.277,-70.561
no net on FAB_DWG (solid): 467.549,-65.285 474.739,-65.285 474.749,-65.285 474.76,-65.287 474.77,-65.289 474.78,-65.292 474.79,-65.296 474.799,-65.301 474.808,-65.306 474.817,-65.313 474.824,-65.32 474.831,-65.328 474.838,-65.336 474.844,-65.345 474.848,-65.354 474.853,-65.364 474.856,-65.374 474.858,-65.384 474.859,-65.394 474.86,-65.402 474.86,-71.932 474.854,-71.943 474.848,-71.954 474.84,-71.965 474.832,-71.975 474.822,-71.983 474.812,-71.992 474.802,-71.999 474.791,-72.005 474.779,-72.01 474.767,-72.014 474.754,-72.017 474.742,-72.019 474.729,-72.02 474.716,-72.02 474.703,-72.019 474.691,-72.016 474.678,-72.013 474.666,-72.008 474.655,-72.002 474.644,-71.996 474.633,-71.988 474.624,-71.98 474.617,-71.973 467.514,-65.496 467.506,-65.489 467.498,-65.481 467.492,-65.473 467.486,-65.464 467.481,-65.455 467.476,-65.445 467.473,-65.435 467.47,-65.425 467.468,-65.415 467.467,-65.404 467.468,-65.393 467.469,-65.383 467.471,-65.372 467.473,-65.362 467.477,-65.352 467.482,-65.342 467.487,-65.333 467.493,-65.325 467.5,-65.317 467.508,-65.309 467.516,-65.302 467.525,-65.296 467.534,-65.291 467.544,-65.287 467.549,-65.285
no net on FAB_DWG (solid): 455.919,-65.285 462.095,-65.285 462.105,-65.285 462.116,-65.286 462.126,-65.289 462.136,-65.292 462.146,-65.295 462.155,-65.3 462.164,-65.306 462.173,-65.312 462.181,-65.319 462.188,-65.326 462.194,-65.335 462.2,-65.343 462.205,-65.353 462.209,-65.362 462.212,-65.372 462.215,-65.382 462.216,-65.393 462.217,-65.403 462.217,-65.414 462.216,-65.424 462.214,-65.434 462.211,-65.444 462.207,-65.454 462.202,-65.463 462.197,-65.472 462.19,-65.481 462.183,-65.489 462.176,-65.496 462.168,-65.502 462.159,-65.508 459.212,-68.991 459.204,-69.001 459.196,-69.009 459.187,-69.018 459.177,-69.025 459.167,-69.031 459.156,-69.037 459.144,-69.041 459.132,-69.045 459.12,-69.047 459.108,-69.049 459.104,-69.049 459.007,-69.049 458.997,-69.049 458.986,-69.047 458.976,-69.045 458.966,-69.042 458.956,-69.038 458.947,-69.033 458.938,-69.028 458.93,-69.021 458.922,-69.014 458.916,-69.008 455.826,-65.483 455.82,-65.475 455.814,-65.466 455.809,-65.457 455.805,-65.447 455.802,-65.437 455.799,-65.427 455.798,-65.416 455.798,-65.406 455.798,-65.395 455.799,-65.385 455.802,-65.375 455.805,-65.364 455.809,-65.355 455.814,-65.345 455.819,-65.337 455.826,-65.328 455.833,-65.32 455.84,-65.313 455.849,-65.307 455.858,-65.301 455.867,-65.296 455.877,-65.292 455.887,-65.289 455.897,-65.287 455.907,-65.285 455.918,-65.285 455.919,-65.285
no net on FAB_DWG (solid): 1029 vertices, not listed, extent 415.578,-78.857 556.624,-65.283
GND on L01 Top Layer "GND" (solid, remove dead copper, pour order 14): 38.1,0.508 0.635,0.508 0.635,26.416 38.1,26.416

## Other copper
L01 Top Layer:
  pour cut-out: 4.517,24.765 ccw(c5.715,24.765) 5.715,23.567 ccw(c5.715,24.765) 6.913,24.765 ccw(c5.715,24.765) 5.715,25.963 ccw(c5.715,24.765)
  pour cut-out: 4.517,2.032 ccw(c5.715,2.032) 5.715,0.834 ccw(c5.715,2.032) 6.913,2.032 ccw(c5.715,2.032) 5.715,3.23 ccw(c5.715,2.032)
  pour cut-out: 31.187,1.905 ccw(c32.385,1.905) 32.385,0.707 ccw(c32.385,1.905) 33.583,1.905 ccw(c32.385,1.905) 32.385,3.103 ccw(c32.385,1.905)
  pour cut-out: 31.623,24.13 31.623,21.133 29.083,21.133 29.083,19.507 27.924,19.501 27.924,17.145 27.559,16.78 27.559,13.97 27.46,14.069 25.502,14.069 25.502,9.779 28.321,9.779 28.321,7.499 31.572,7.499 31.572,8.757 31.623,8.808 31.623,10.287 34.163,10.287 35.687,11.811 30.988,11.811 30.988,15.24 35.052,15.24 35.052,17.577 35.56,17.577 35.56,19.482 35.306,19.482 35.306,21.031 32.207,24.13
  region net GND: 8.07,17.648 8.645,18.223 8.645,18.542 8.966,18.542 8.966,17.83 8.811,17.83 8.35,17.369
  region net +3.3V: 10.795,17.399 8.812,17.399 8.593,17.18 8.593,16.209 8.699,16.104 10.617,16.104 10.795,16.281
  pour cut-out: 3.581,17.78 5.467,17.78 5.467,18.67 8.382,18.67 8.382,18.359 8.966,18.359 11.201,18.359 11.201,15.367 5.467,15.367 5.467,16.815 3.581,16.815
  pour cut-out: 3.995,26.543 3.995,22.987 0.508,22.987 0.508,4.064 3.995,4.064 3.995,0.381 0,0.381 0,26.543
  pour cut-out: 15.215,15.875 13.31,17.78 13.31,21.463 12.802,21.971 12.802,25.019 13.564,25.781 20.549,25.781 21.717,24.613 21.717,18.694 18.898,15.875
  pour cut-out: 34.493,26.931 34.493,22.962 38.1,22.962 38.1,16.789 38.1,10.16 38.1,4.064 34.493,4.064 34.493,0 38.5,0 38.481,0.019 38.481,26.995
  text ".Layer_Name" at -1.053,-70 h3.5
L03 PWR:
  pour cut-out: 3.995,26.543 3.995,23.005 1.016,23.005 1.016,4.064 3.995,4.064 3.995,0.381 0,0.381 0,26.543
L02 GND:
  pour cut-out: 3.995,26.543 3.995,22.987 0.508,22.987 0.508,4.064 3.995,4.064 3.995,0.381 0,0.381 0,26.543
  pour cut-out: 34.505,23.005 37.846,23.005 37.846,16.129 37.846,10.287 37.846,3.995 34.505,3.995 34.505,0 38.481,0 38.481,27.051 34.505,27.051
L04 Bottom Layer:
  pour cut-out: 4.064,0 4.064,4.064 33.528,4.064 33.528,0
  pour cut-out: 4.064,26.543 4.064,23.005 0.508,23.005 0.508,4.064 4.064,4.064 4.064,0.381 0,0.381 0,26.543
  pour cut-out: 34.417,22.987 37.846,22.987 37.846,16.002 35.052,16.002 35.052,11.049 37.973,11.049 37.973,4.064 33.528,4.064 33.528,0 38.481,0 38.481,27.051 34.417,27.051
  text "'.Board_Number'-R'.PCB_Revision'" at 25.654,0.762 h1.52
  text ".Layer_Name" at -5.544,-70 h3.5
Multi-Layer:
  pour cut-out: 0.005,2 ccw(c2,2) 2,0.005 ccw(c2,2) 3.995,2 ccw(c2,2) 2,3.995 ccw(c2,2)
  pour cut-out: 34.505,2 ccw(c36.5,2) 36.5,0.005 ccw(c36.5,2) 38.495,2 ccw(c36.5,2) 36.5,3.995 ccw(c36.5,2)
  pour cut-out: 0.005,25 ccw(c2,25) 2,23.005 ccw(c2,25) 3.995,25 ccw(c2,25) 2,26.995 ccw(c2,25)
  pour cut-out: 34.505,25 ccw(c36.5,25) 36.5,23.005 ccw(c36.5,25) 38.495,25 ccw(c36.5,25) 36.5,26.995 ccw(c36.5,25)
  pour cut-out: 16.84,23.368 ccw(c18.288,23.368) 18.288,21.92 ccw(c18.288,23.368) 19.736,23.368 ccw(c18.288,23.368) 18.288,24.816 ccw(c18.288,23.368)
  pour cut-out: 13.665,23.368 ccw(c15.113,23.368) 15.113,21.92 ccw(c15.113,23.368) 16.561,23.368 ccw(c15.113,23.368) 15.113,24.816 ccw(c15.113,23.368)
  pour cut-out: 13.665,18.288 ccw(c15.113,18.288) 15.113,16.84 ccw(c15.113,18.288) 16.561,18.288 ccw(c15.113,18.288) 15.113,19.736 ccw(c15.113,18.288)
  pour cut-out: 16.84,18.288 ccw(c18.288,18.288) 18.288,16.84 ccw(c18.288,18.288) 19.736,18.288 ccw(c18.288,18.288) 18.288,19.736 ccw(c18.288,18.288)
  pour cut-out: 19.456,21.844 ccw(c20.193,21.844) 20.193,21.107 ccw(c20.193,21.844) 20.93,21.844 ccw(c20.193,21.844) 20.193,22.581 ccw(c20.193,21.844)
  pour cut-out: 19.456,19.812 ccw(c20.193,19.812) 20.193,19.075 ccw(c20.193,19.812) 20.93,19.812 ccw(c20.193,19.812) 20.193,20.549 ccw(c20.193,19.812)
  pour cut-out: 14.376,20.828 ccw(c15.113,20.828) 15.113,20.091 ccw(c15.113,20.828) 15.85,20.828 ccw(c15.113,20.828) 15.113,21.565 ccw(c15.113,20.828)

## Silkscreen, mask and mechanical layers (free items; w line width, h text height)
Top Overlay:
  lines w0.127: 13.716,22.352 14.351,21.717 15.723,21.717 ; 13.818,19.507 14.224,19.914 15.748,19.914 ; 16.688,16.916 16.688,19.228 17.12,19.66 ; 16.739,24.816 16.739,22.377 17.17,21.946 ; 19.355,20.625 19.583,20.853 ; 19.685,20.853 19.583,20.853 ; 20.701,20.853 19.609,20.853 19.583,20.853
  lines w1.8: 23.622,1.524 26.322,1.524
  text "SWCLK" at 15.291,25.044 h0.89
  text "GND" at 24.003,23.368 h0.89
  text "SWDIO" at 13.487,21.285 h0.89 r90
  text "DTM_RX" at 22.733,20.447 h0.89
  text "GND" at 21.946,19.177 h0.89 r90
  text "+5V" at 1.237,18.923 h0.89
  text "K" at 5.08,18.034 h0.89 r90
  text "DTM_TX" at 22.733,17.653 h0.89
  text "+3V3" at 13.538,17.374 h0.89 r90
  text "RSTn" at 14.783,15.672 h0.89
  text "GND" at 4.006,14.351 h0.89
  text "+3V3" at 11.303,13.843 h0.89
  text "K" at 6.35,11.684 h0.89 r90
  text "UART_TX" at 4.064,10.541 h0.89
  text "K" at 6.35,9.652 h0.89 r90
  text "UART_RX" at 4.064,7.493 h0.89
  text "GND" at 11.684,5.969 h0.89
  text "'.Board_Name'" at 16.485,5.486 h1.52
  text "600-'.Board_Number'" at 16.485,3.2 h1.52
  text "REV" at 16.637,0.762 h1.52
  text ".Layer_Name" at -1.894,-69.917 h3.5
Bottom Overlay:
  text ".Layer_Name" at -6.819,-69.842 h3.5
Top Paste:
  rectangle: 7.798,3.861 8.377,4.089
  text ".Layer_Name" at -1.769,-70.617 h3.5
Bottom Paste:
  text ".Layer_Name" at -5.694,-70.583 h3.5
Top Solder:
  text ".Layer_Name" at -1.878,-70 h3.5
Bottom Solder:
  text ".Layer_Name" at -5.319,-70.117 h3.5
Drill Guide:
  text ".Layer_Name" at 20.581,-25.167 h3.81
Outline:
  the board outline again, w0.1
FAB_DWG:
  drawing of 407 lines, arcs and shapes, not listed
  text "1" at 499.46,379.131 h7.62
  text "6" at -51.872,378.953 h7.62
  text "5" at 58.72,378.877 h7.62
  text "7" at -161.803,378.826 h7.62
  text "4" at 168.321,378.725 h7.62
  text "3" at 279.09,378.725 h7.62
  text "2" at 389.123,378.725 h7.62
  text "REVISIONS" at 453.48,370.143 h2.54
  text "REV" at 371.188,363.143 h2.03
  text "DESCRIPTION" at 425.692,363.143 h2.03
  text "DATE" at 517.376,363.143 h2.03
  text "APRVD" at 542.564,363.143 h2.03
  text "NOTES: UNLESS OTHERWISE SPECIFIED" at -205.497,360.965 h2.03
  text "'.Print_Date'" at 510.751,355.246 h2.54
  text "01" at 371.592,355.143 h2.54
  text "INITIAL RELEASE" at 382.624,355.143 h2.54
  text "1   DIMENSIONS AND VALUES ARE METRIC." at -205.497,352.965 h2.03
  text "2   FABRICATION OF PRINTED CIRCUIT BOARD SHALL BE IN ACCORDANCE WITH" at -205.497,346.965 h2.03
  text "IPC-6011 AND IPC-6012, CLASS 2, AND THE DESIGN INTENT OF IPC-2221 AND" at -205.497,342.965 h2.03
  text "IPC-2222,CLASS 2, AND SHALL MEET THE ACCEPTABILITY REQUIREMENTS OF" at -205.497,338.965 h2.03
  text "IPC-A-600. PRODUCE PCB USING GERBER OR ODB++ FILES PROVIDED." at -205.497,334.965 h2.03
  text "3   FABRICATION VENDOR MUST BE UL APPROVED AND BOARD SHALL BE MARKED WITH" at -205.497,328.965 h2.03
  text "A UL REGISTERED LOGO. MATERIAL MUST MEET UL 94V-0 FLAMMABILITY RATING." at -205.497,324.965 h2.03
  text "4   MATERIAL REQUIREMENTS: MANUFACTURER SHALL SELECT MATERIALS TO ACHIEVE A" at -205.497,318.965 h2.03
  text "BALANCED CONSTRUCTION WITH THE OPTION OF MODIFYING DIELECTRIC THICKNESS" at -205.497,314.965 h2.03
  text "TO MEET THE REQUIREMENTS SPECIFIED HEREIN." at -205.497,310.965 h2.03
  text "D" at 561.309,309.459 h7.62
  text "D" at -223.373,309.307 h7.62
  text "5   BASE MATERIALS: GLASS EPOXY FR4 OR EQUIVALENT PER IPC-4101 MEETING RoHS" at -205.497,304.965 h2.03
  text "REQUIREMENTS FOR PCB FABRICATION AND ASSEMBLY, NOT LESS THAN TG150," at -205.497,300.965 h2.03
  text "A  SEE LAYER DETAIL FOR LAYER STACK UP, ESTIMATED DIELECTRIC THICKNESS," at -205.497,296.965 h2.03
  text "AND COPPER WEIGHT." at -205.497,292.965 h2.03
  text "B  MANUFACTURER SHALL SUBMIT A PROPOSED STACK UP FOR SYNAPSE APPROVAL" at -205.497,288.965 h2.03
  text "IF MODIFICATION IS REQUIRED." at -205.497,284.965 h2.03
  text "C  NO MATERIAL SUBSTITUTIONS WILL BE ALLOWED WITHOUT SYNAPSE APPROVAL." at -205.497,280.965 h2.03
  text "6   PROCESSING ALLOWANCE:" at -205.497,274.965 h2.03
  text "A  LAYER REGISTRATION FROM PRIMARY SIDE TO SECONDARY SIDE SHALL NOT" at -205.497,270.965 h2.03
  text "EXCEED 0.13mm TOTAL." at -205.497,266.965 h2.03
  text "B  MAXIMUM BOW AND TWIST SHALL BE .75% PER IPC-TM-650." at -205.497,262.965 h2.03
  text "7   VIAS" at -205.497,256.965 h2.03
  text "A  VIAS WITH A FINISHED HOLE SIZE OF 0.25mm OR SMALLER DO NOT REQUIRE" at -205.497,252.965 h2.03
  text "A MINIMUM HOLE SIZE AND MAY BE PLATED SHUT OR FILLED WITH SOLDER" at -205.497,248.965 h2.03
  text "MASK. MINIMUM SOLDER PLATING MUST BE MAINTAINED." at -205.497,244.965 h2.03
  text "B  ALL LASER VIA IN PADS TO BE COPLANAR IF PRESENT IN DESIGN." at -205.497,240.965 h2.03
  text "8   CONDUCTORS:  COPPER FOIL SHALL BE IN ACCORDANCE WITH IPC-4562/0." at -205.497,234.965 h2.03
  text "A  FINISH. COPPER PLATE THICKNESS ON SURFACE COPPER AND PLATED" at -205.497,230.965 h2.03
  text "THROUGH HOLES TO BE 0.025mm MINIMUM." at -205.497,226.965 h2.03
  text "B  MINIMUM FINISH CONDUCTOR WIDTH IS 0.076mm" at -205.497,222.965 h2.03
  text "C  MINIMUM FINISHED CONDUCTOR SPACING (AIR GAP) INCLUDING PADS, VIAS," at -205.497,218.965 h2.03
  text "SHAPES, ETC. IS 0.076mm." at -205.497,214.965 h2.03
  text "9   FINAL FINISH SHALL BE ELECTROLESS NICKEL / IMMERSION GOLD (ENIG)." at -205.497,208.965 h2.03
  text "FINISH THICKNESS SHALL BE 3 TO 6 um [118 TO 236 MICROINCHES] OF NICKEL" at -205.497,204.965 h2.03
  text "AND 0.04 TO 0.125um [1.5 TO 5 MICROINCHES] OF GOLD." at -205.497,200.965 h2.03
  text "FINISH SHALL BE RoHS COMPLIANT AND MEET REQUIREMENTS OF IPC-4552." at -205.497,196.965 h2.03
  text "10  FILLETING IS NOT PERMITTED WITHOUT PRIOR SYNAPSE APPROVAL." at -205.497,190.965 h2.03
  text "11  SOLDER MASK AND COATING:  APPLY SOLDER MASK TO PRIMARY AND SECONDARY" at -205.497,184.965 h2.03
  text "C" at 561.309,184.008 h7.62
  text "C" at -223.5,183.805 h7.62
  text "SIDES OF PRINTED WIRING BOARD USING SUPPLIED GERBER FILES IN ACCORDANCE" at -205.497,180.965 h2.03
  text "WITH IPC-SM-840, THICKNESS BETWEEN 0.02 - 0.04mm, COLOR GREEN LIQUID" at -205.497,176.965 h2.03
  text "PHOTO-IMAGEABLE, CLASS 2." at -205.497,172.965 h2.03
  text "12  OVERALL BOARD THICKNESS SHALL BE MEASURED OVER FINAL FINISH INCLUDING" at -205.497,166.965 h2.03
  text "SOLDER MASK." at -205.497,162.965 h2.03
  text "13  SILKSCREEN:  APPLY SILKSCREEN (LEGEND) TO PRIMARY AND SECONDARY SIDES" at -205.497,156.965 h2.03
  text "OF PRINTED CIRCUIT BOARD. USE PERMANENT INK, NON-NUTRIENT, NON-" at -205.497,152.965 h2.03
  text "CONDUCTIVE POLYMER, COLOR WHITE, PER IPC-4781, TYPE 2. RELIEVE LEGEND" at -205.497,148.965 h2.03
  text "FROM ALL EXPOSED LANDS AND HOLES AS REQUIRED." at -205.497,144.965 h2.03
  text "14  ANY ALTERATIONS TO THE PROVIDED GERBER ARTWORK FILES MUST BE SUBMITTED" at -205.497,138.965 h2.03
  text "TO SYNAPSE FOR APPROVAL." at -205.497,134.965 h2.03
  text "15  IMPEDANCE REQUIREMENTS: LAYERS AND SIGNALS WITH CONTROLLED IMPEDANCES" at -205.497,128.965 h2.03
  text "ARE DETAILED IN THE CONTROLLED IMPEDANCE CHART. MANUFACTURER HAS THE" at -205.497,124.965 h2.03
  text "OPTION OF ADJUSTING THE DIELECTRIC THICKNESS AND TRACE WIDTHS AS" at -197.747,120.715 h2.03
  text "REQUIRED TO MEET THE SPECIFICATIONS CONTAINED IN THIS DRAWING." at -197.747,116.715 h2.03
  text "A  IMPEDANCE TOLERANCES ARE +/-10%." at -205.247,111.715 h2.03
  text "B  ANY ADJUSTMENTS TO DIELECTRIC THICKNESS OR TRACE WIDTHS MUST BE" at -205.247,106.965 h2.03
  text "APPROVED BY SYNAPSE." at -205.497,103.215 h2.03
  text "C  IMPEDANCE TEST RESULTS AND TEST COUPONS FROM EACH LOT SHALL BE" at -209.247,98.715 h2.03
  text "PROVIDED TO SYNAPSE." at -209.247,94.965 h2.03
  text "16  MARK MANUFACTURER NAME, INITIALS, OR LOGO, LOT NUMBER, DATE CODE," at -205.497,89.965 h2.03
  text "UL RECOGNITION MARK AND FLAME RATING IN ETCH OR SILKSCREEN." at -205.497,85.965 h2.03
  text "17  PANELIZATION: COORDINATE WITH SYNAPSE OR THE SYNAPSE SPECIFIED" at -205.747,79.215 h2.03
  text "Layer" at 1.46,77.66 h1.52
  text "Name" at 11.872,77.66 h1.52
  text "Material" at 38.535,77.66 h1.52
  text "Thickness" at 60.373,77.66 h1.52
  text "Constant" at 76.879,77.66 h1.52
  text "Board Layer Stack" at 91.353,77.66 h1.52
  text "ASSEMBLY VENDOR FOR PANEL SIZE AND CONFIGURATION." at -205.747,75.215 h2.03
  text "1" at 1.46,74.612 h1.52
  text "Top Overlay" at 11.872,74.612 h1.52
  text "2" at 1.46,71.564 h1.52
  text "Top Solder" at 11.872,71.564 h1.52
  text "Solder Resist" at 38.535,71.564 h1.52
  text "0.020mm" at 60.373,71.564 h1.52
  text "3.5" at 76.879,71.564 h1.52
  text "A   TOOLING HOLES AND FIDUCIALS SHALL BE PLACED ON PANEL FRAME OR RAILS" at -194.497,70.965 h2.03
  text "3" at 1.46,68.516 h1.52
  text "L01 Top Layer" at 11.872,68.516 h1.52
  text "Copper" at 38.535,68.516 h1.52
  text "0.036mm" at 60.373,68.516 h1.52
  text "IF NOT PRESENT IN DESIGN." at -186.747,66.465 h2.03
  text "4" at 1.46,65.468 h1.52
  text "Dielectric 1" at 11.872,65.468 h1.52
  text "FR-4" at 38.535,65.468 h1.52
  text "0.127mm" at 60.373,65.468 h1.52
  text "4.2" at 76.879,65.468 h1.52
  text "5" at 1.46,62.42 h1.52
  text "L02 GND" at 11.872,62.42 h1.52
  text "Copper" at 38.535,62.42 h1.52
  text "0.036mm" at 60.373,62.42 h1.52
  text "B   IF BOARDS ARE NOT TO BE COMPLETELY ROUTED OUT, TRIM PANELIZATION" at -194.497,61.965 h2.03
  text "6" at 1.46,59.372 h1.52
  text "Dielectric 2" at 11.872,59.372 h1.52
  text "FR-4" at 38.535,59.372 h1.52
  text "0.462mm" at 60.373,59.372 h1.52
  text "4.2" at 76.879,59.372 h1.52
  text "B" at -223.271,58.405 h7.62
  text "B" at 561.436,58.405 h7.62
  text "TABS TO LESS THAN 0.1mm UPON DE-PANELIZATION. AVOID PANELIZATION" at -188.497,57.965 h2.03
  text "7" at 1.46,56.325 h1.52
  text "L03 PWR" at 11.872,56.325 h1.52
  text "Copper" at 38.535,56.325 h1.52
  text "0.036mm" at 60.373,56.325 h1.52
  text "TABS IN AREAS INDICATED ON THIS DRAWING." at -186.497,53.965 h2.03
  text "8" at 1.46,53.276 h1.52
  text "Dielectric 3" at 11.872,53.276 h1.52
  text "FR-4" at 38.535,53.276 h1.52
  text "0.127mm" at 60.373,53.276 h1.52
  text "4.2" at 76.879,53.276 h1.52
  text "9" at 1.46,50.228 h1.52
  text "L04 Bottom Layer" at 11.872,50.228 h1.52
  text "Copper" at 38.535,50.228 h1.52
  text "0.036mm" at 60.373,50.228 h1.52
  text "10" at 1.46,47.18 h1.52
  text "Bottom Solder" at 11.872,47.18 h1.52
  text "Solder Resist" at 38.535,47.18 h1.52
  text "0.020mm" at 60.373,47.18 h1.52
  text "3.5" at 76.879,47.18 h1.52
  text "18  BOARD MUST BE ELECTRICALLY TESTED USING SUPPLIED IPC-356 NETLIST." at -205.497,46.965 h2.03
  text "11" at 1.46,44.133 h1.52
  text "Bottom Overlay" at 11.872,44.133 h1.52
  text "19  DECLARATION OF CONFORMITY REQUIRED FOR ROHS RECAST. 'DIRECTIVE 2011/65/EU.'" at -205.497,40.965 h2.03
  text "VENDOR TO SPECIFY APPLICABLE EXEMPTIONS." at -205.497,36.965 h2.03
  text "DIMENSIONS ARE FOR REFERENCE ONLY," at -8.369,-8.96 h2.29
  text "USE BOARD OUTLINE FOR DIMENSIONAL DATA." at -12.959,-13.75 h2.29
  text "A" at 561.182,-67.35 h7.62
  text "A" at -223.525,-67.477 h7.62
  text "APPROVALS" at 353.316,-70.857 h2.03
  text "DATE" at 396.376,-70.857 h2.03
  text "UNLESS OTHERWISE" at 297.368,-72.857 h2.54
  text "DESIGNER" at 336.624,-76.857 h2.03
  text "SPECIFIED" at 304.48,-77.857 h2.54
  text "XXX" at 340.751,-82.568 h2.54
  text "DIMENSIONS ARE" at 299.4,-82.857 h2.54
  text "'.Print_Date'" at 390.464,-82.857 h2.54
  text "1511 Sixth Ave. Suite 300, Seattle, WA 98101 206.381.0898" at 427.712,-83.857 h2.54
  text "IN MILLIMETERS" at 299.4,-87.857 h2.54
  text "ENGINEER" at 336.624,-89.857 h2.03
  text "PRINTED CIRCUIT BOARD" at 454.12,-92.357 h3.81
  text "PROPRIETARY" at 248.86,-92.857 h3.81
  text "XXX" at 341.005,-95.395 h2.54
  text "'.Print_Date'" at 389.956,-95.811 h2.54
  text "TOLERANCES:" at 303.448,-97.857 h2.54
  text "AND" at 261.052,-98.857 h3.81
  text "'.Board_Name'" at 458.978,-100.33 h5.08
  text "MECH ENG" at 336.624,-102.857 h2.03
  text ".XX" at 302.128,-104.857 h2.29
  text "0.25" at 315.624,-104.857 h2.29
  text "CONFIDENTIAL" at 247.336,-105.357 h3.81
  text "SIZE" at 419.776,-106.857 h1.78
  text "DWG NO" at 430.624,-106.857 h1.78
  text "REV" at 538.488,-106.857 h1.78
  text "XXX" at 340.624,-108.857 h2.54
  text "THE INFORMATION CONTAINED IN" at 249.35,-109.607 h1.52
  text ".XXX" at 300.296,-111.857 h2.29
  text "0.127" at 315.624,-111.857 h2.29
  text "THIS DRAWING IS PROPRIETARY AND" at 247.526,-112.357 h1.52
  text "RESTRICTED. ANY REPRODUCTION" at 249.35,-115.107 h1.52
  text "601-" at 442.654,-116.371 h7.62
  text ".Board_Number" at 471.054,-116.471 h7.62
  text "D" at 419.576,-116.857 h7.62
  text ".PCB_Revision" at 534.396,-117.713 h7.62
  text "IN PART OR WHOLE WITHOUT THE" at 249.35,-117.857 h1.52
  text "ANGLES" at 302.632,-118.857 h2.29
  text "5" at 321.624,-118.857 h2.29
  text "EXPRESS WRITTEN PERMISSION" at 250.316,-120.607 h1.52
  text "OF THE OWNER IS PROHIBITED" at 250.316,-123.357 h1.52
  text "SCALE:NONE" at 420.504,-123.857 h1.78
  text "SHEET 1 OF 1" at 532.08,-123.857 h1.78
  text "1" at 499.664,-135.905 h7.62
  text "6" at -51.796,-136.057 h7.62
  text "5" at 58.643,-136.057 h7.62
  text "4" at 168.092,-136.336 h7.62
  text "3" at 278.912,-136.362 h7.62
  text "2" at 389.351,-136.362 h7.62
  text "7" at -161.905,-136.921 h7.62
TITLEBLOCK:
  lines w0.25: -29.53,-63.87 91.47,-63.87 ; 28.97,-44.87 91.47,-44.87 91.47,-73.37 -29.53,-73.37 -29.53,-51.37 91.47,-51.37 ; 46.97,-73.37 46.97,-44.87 ; 46.97,-56.37 91.47,-56.37 ; 80.47,-63.87 80.47,-56.37
  text "PRODUCT" at 33.214,-47.37 h1.52
  text "1511 SIXTH AVENUE, THIRD FLOOR" at 47.97,-47.37 h1.52
  text "DEVELOPMENT" at 31.282,-50.37 h1.52
  text "SEATTLE,WA 98101  206.381.0898" at 47.97,-50.37 h1.52
  text "DATE" at 47.97,-53.37 h1.02
  text "'.Print_Date'" at 60.85,-54.87 h2.03
  text "PRINTED CIRCUIT BOARD" at -10.766,-55.87 h2.29
  text "PART NUMBER" at 47.97,-58.37 h1.02
  text "REV" at 84.746,-58.37 h1.02
  text "601-" at 53.625,-62.071 h2.54
  text "'.Board_Number'" at 63.925,-62.071 h2.54
  text ".Board_Name" at -10.875,-62.2 h3.81
  text ".PCB_Revision" at 83.77,-62.538 h2.54
  text "PROPRIETARY AND CONFIDENTIAL" at 52.196,-66.87 h1.52
  text "THE INFORMATION CONTAINED IN THIS DRAWING IS PROPRIETARY AND" at 50.98,-68.87 h0.76
  text "RESTRICTED. ANY REPRODUCTION IN PART OR WHOLE WITHOUT THE" at 51.892,-70.37 h0.76
  text "EXPRESS WRITTEN PERMISSION OF THE OWNER IS PROHIBITED" at 52.608,-71.87 h0.76
TOP_COURTYARD:
  text ".Layer_Name" at -4.9,-69.842 h3.5
BOT_COURTYARD:
  text ".Layer_Name" at -4.9,-69.842 h3.5
Drill Drawing:
  lines w0.254: 59.24,6.075 59.664,6.075 60.087,5.651 60.51,6.075 60.934,6.075 60.51,6.498 60.934,6.921 60.51,6.921 60.087,7.345 59.664,6.921 59.24,6.921 59.664,6.498 59.24,6.075 ; 59.24,11.155 60.934,11.155 60.087,9.461 59.24,11.155 ; 59.24,13.271 59.24,13.695 59.664,14.118 59.24,14.541 59.24,14.965 59.664,14.965 60.087,14.541 60.51,14.965 60.934,14.965 60.934,14.541 60.51,14.118 60.934,13.695 60.934,13.271 60.51,13.271 60.087,13.695 59.664,13.271 59.24,13.271 ; 59.24,17.081 60.087,17.505 60.934,17.081 60.51,17.928 60.934,18.775 60.087,18.351 59.24,18.775 59.664,17.928 59.24,17.081 ; 59.24,20.892 60.934,20.892 60.934,22.585 59.24,22.585 59.24,20.892
  lines w0.381: 57.722,4.508 307.943,4.508 ; 57.722,23.558 307.943,23.558 ; 71.714,0.699 71.714,27.368 ; 89.438,0.699 89.438,27.368 ; 123.617,0.699 123.617,27.368 ; 136.466,0.699 136.466,27.368 ; 155.104,0.699 155.104,27.368 ; 205.127,0.699 205.127,27.368 ; 220.109,0.699 220.109,27.368 ; 239.053,0.699 239.053,27.368 ; 272.926,0.699 272.926,27.368 ; 57.722,0.699 307.943,0.699 307.943,27.368 57.722,27.368 57.722,0.699
  text "Symbol" at 60.008,24.701 h1.83
  text "Hit Count" at 72.857,24.701 h1.83
  text "Finished Hole Size" at 90.581,24.701 h1.83
  text "Plated" at 124.76,24.701 h1.83
  text "Hole Type" at 137.609,24.701 h1.83
  text "Drill Layer Pair" at 156.247,24.701 h1.83
  text "Via/Pad" at 206.27,24.701 h1.83
  text "Pad Shape" at 221.252,24.701 h1.83
  text "Hole Tolerance (+)" at 240.196,24.701 h1.83
  text "Hole Tolerance (-)" at 274.069,24.701 h1.83
  text "121" at 72.857,20.892 h1.52
  text "9.842mil (0.250mm)" at 90.581,20.892 h1.52
  text "PTH" at 124.76,20.892 h1.52
  text "Round" at 137.609,20.892 h1.52
  text "L01 Top Layer - L04 Bottom Layer" at 156.247,20.892 h1.52
  text "Via" at 206.27,20.892 h1.52
  text "Rounded" at 221.252,20.892 h1.52
  text "3.000mil (0.076mm)" at 240.196,20.892 h1.52
  text "9.843mil (0.250mm)" at 274.069,20.892 h1.52
  text "3" at 72.857,17.081 h1.52
  text "39.173mil (0.995mm)" at 90.581,17.081 h1.52
  text "NPTH" at 124.76,17.081 h1.52
  text "Round" at 137.609,17.081 h1.52
  text "L01 Top Layer - L04 Bottom Layer" at 156.247,17.081 h1.52
  text "Pad" at 206.27,17.081 h1.52
  text "Rounded" at 221.252,17.081 h1.52
  text "2.000mil (0.051mm)" at 240.196,17.081 h1.52
  text "2.000mil (0.051mm)" at 274.069,17.081 h1.52
  text "4" at 72.857,13.271 h1.52
  text "43.000mil (1.092mm)" at 90.581,13.271 h1.52
  text "PTH" at 124.76,13.271 h1.52
  text "Round" at 137.609,13.271 h1.52
  text "L01 Top Layer - L04 Bottom Layer" at 156.247,13.271 h1.52
  text "Pad" at 206.27,13.271 h1.52
  text "(Mixed)" at 221.252,13.271 h1.52
  text "3.000mil (0.076mm)" at 240.196,13.271 h1.52
  text "3.000mil (0.076mm)" at 274.069,13.271 h1.52
  text "4" at 72.857,9.461 h1.52
  text "78.740mil (2.000mm)" at 90.581,9.461 h1.52
  text "NPTH" at 124.76,9.461 h1.52
  text "Round" at 137.609,9.461 h1.52
  text "L01 Top Layer - L04 Bottom Layer" at 156.247,9.461 h1.52
  text "Pad" at 206.27,9.461 h1.52
  text "Rounded" at 221.252,9.461 h1.52
  text "2.000mil (0.051mm)" at 240.196,9.461 h1.52
  text "2.000mil (0.051mm)" at 274.069,9.461 h1.52
  text "4" at 72.857,5.651 h1.52
  text "93.504mil (2.375mm)" at 90.581,5.651 h1.52
  text "NPTH" at 124.76,5.651 h1.52
  text "Round" at 137.609,5.651 h1.52
  text "L01 Top Layer - L04 Bottom Layer" at 156.247,5.651 h1.52
  text "Pad" at 206.27,5.651 h1.52
  text "Rounded" at 221.252,5.651 h1.52
  text "2.000mil (0.051mm)" at 240.196,5.651 h1.52
  text "2.000mil (0.051mm)" at 274.069,5.651 h1.52
  text "136 Total" at 72.857,1.841 h1.52
  text ".Layer_Name" at 17.581,-25.042 h3.81

## Dimensions
0,0 to 0,27 on FAB_DWG
0,27 to 38.5,27 on FAB_DWG